# Altium PCB bridge8.PcbDoc
Units mil, origin at the board's own origin, x right, y up, seen from the top; angles counter-clockwise.
Board outline 1968.5 x 1102.36 mil, 4 copper layers (Top Layer, Signal Layer 1, Signal Layer 2, Bottom Layer), stack 30.635 mil thick; 4 components, 64 nets, 39 pads, 802 vias.
Unrouted connection lines stored in the file: 2.
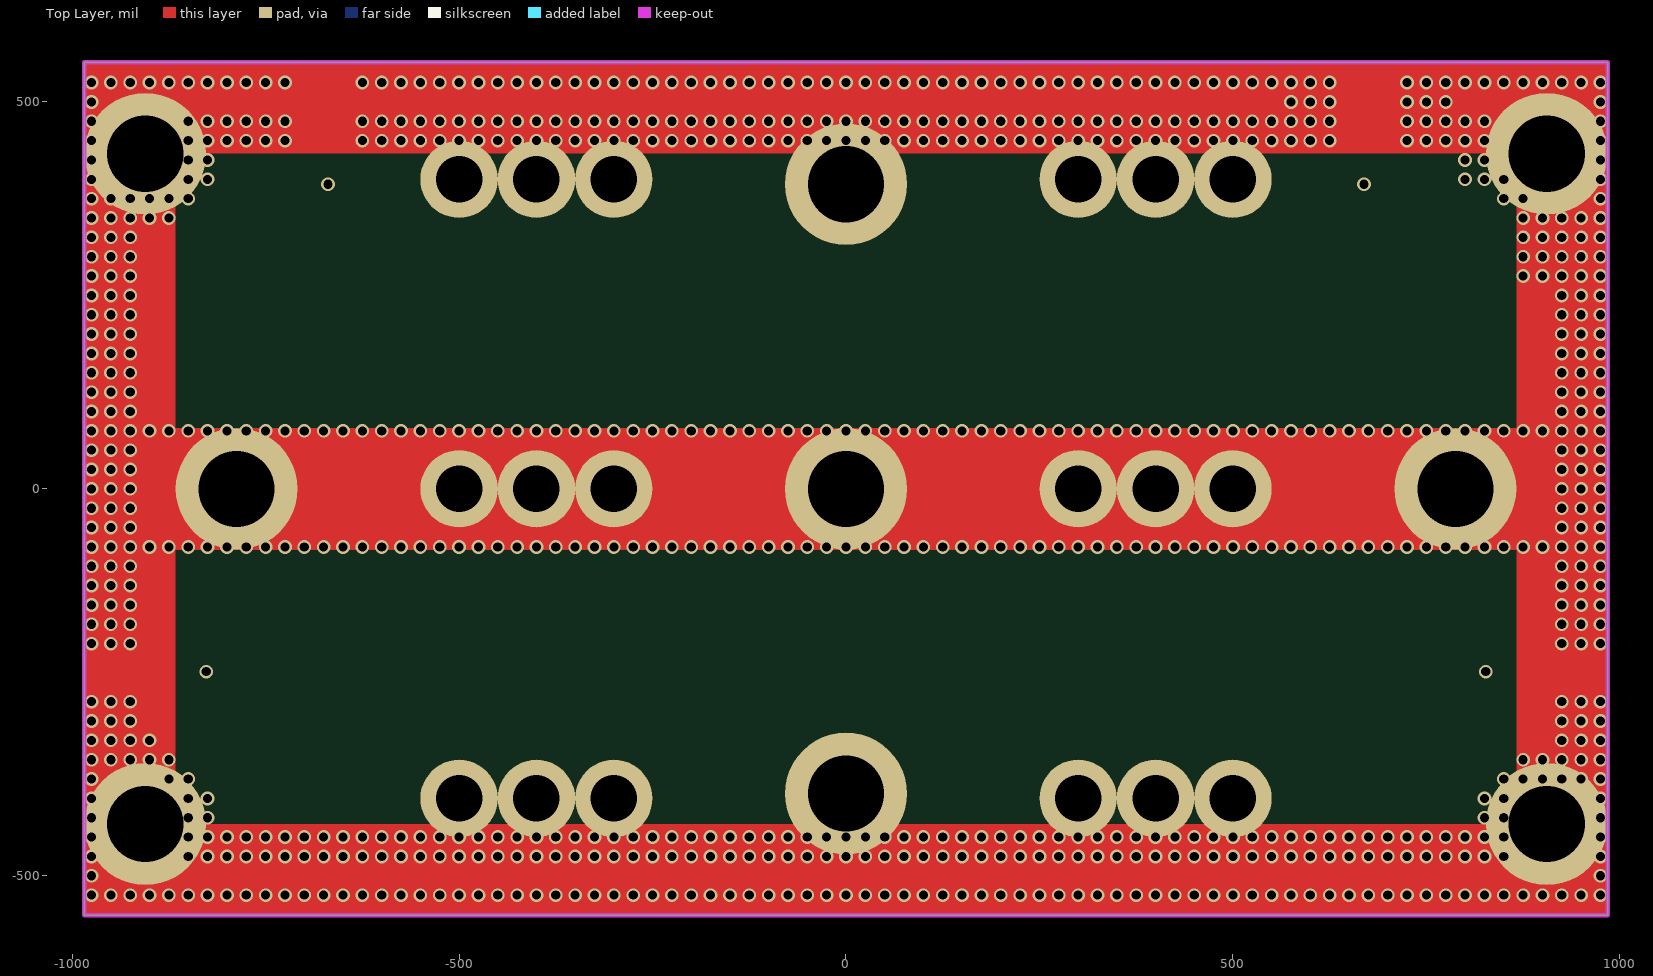
[diagram p0: Top Layer view]
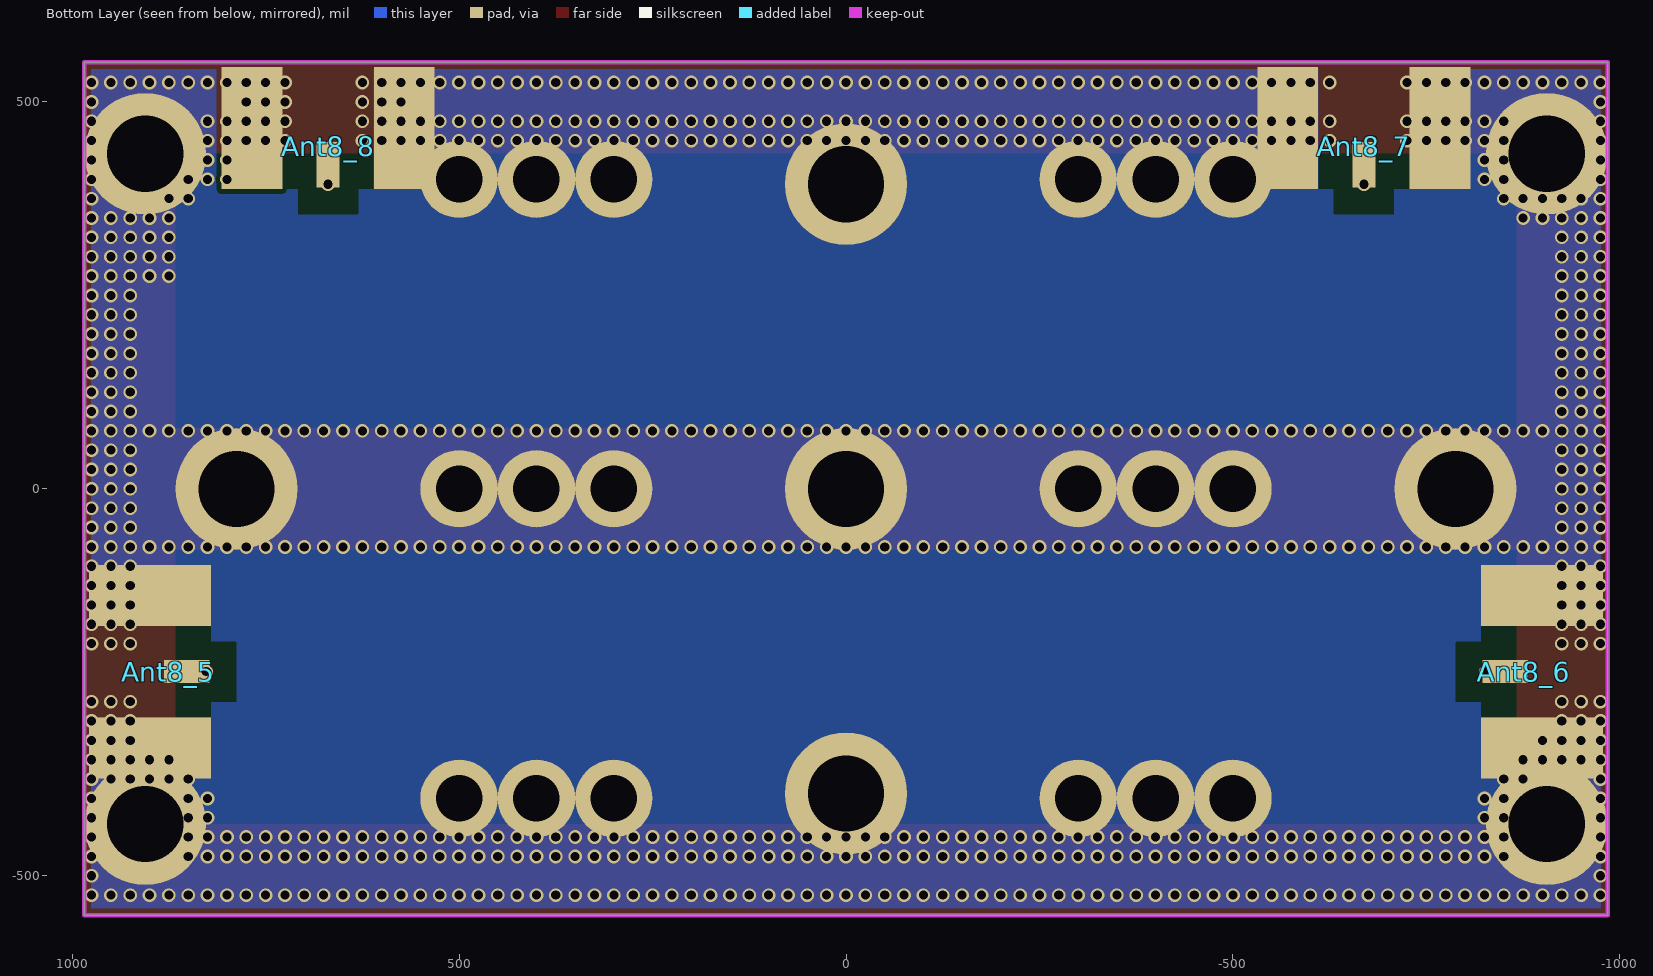
[diagram p1: Bottom Layer view, seen from below]
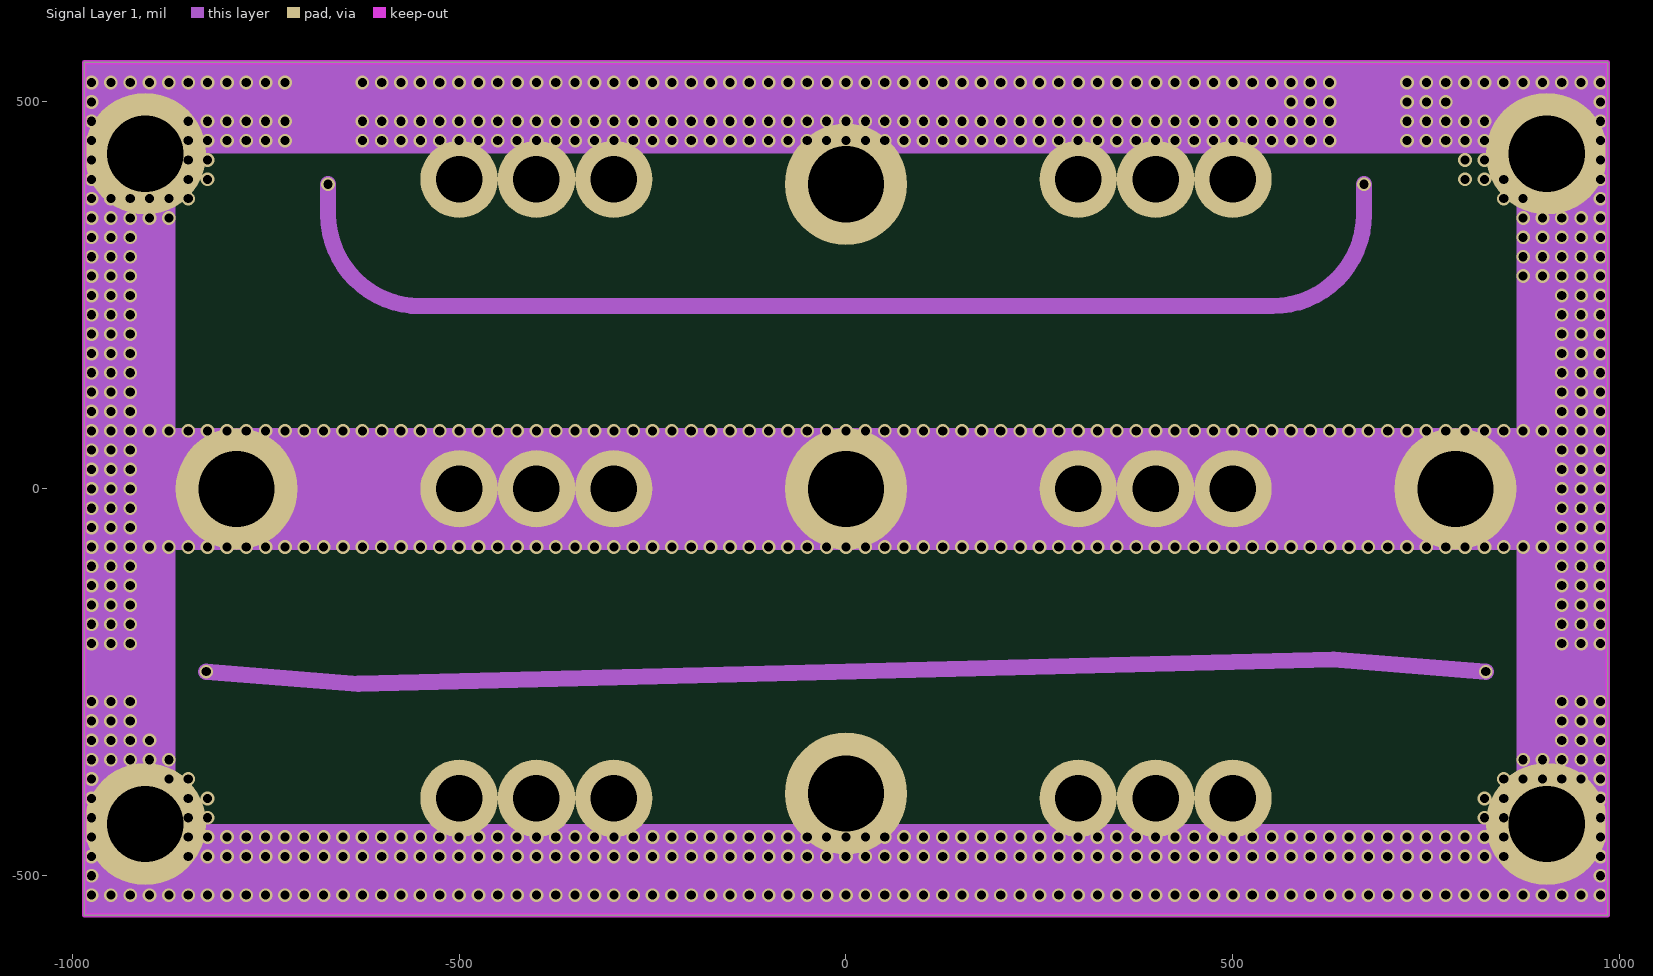
[diagram p2: Signal Layer 1]
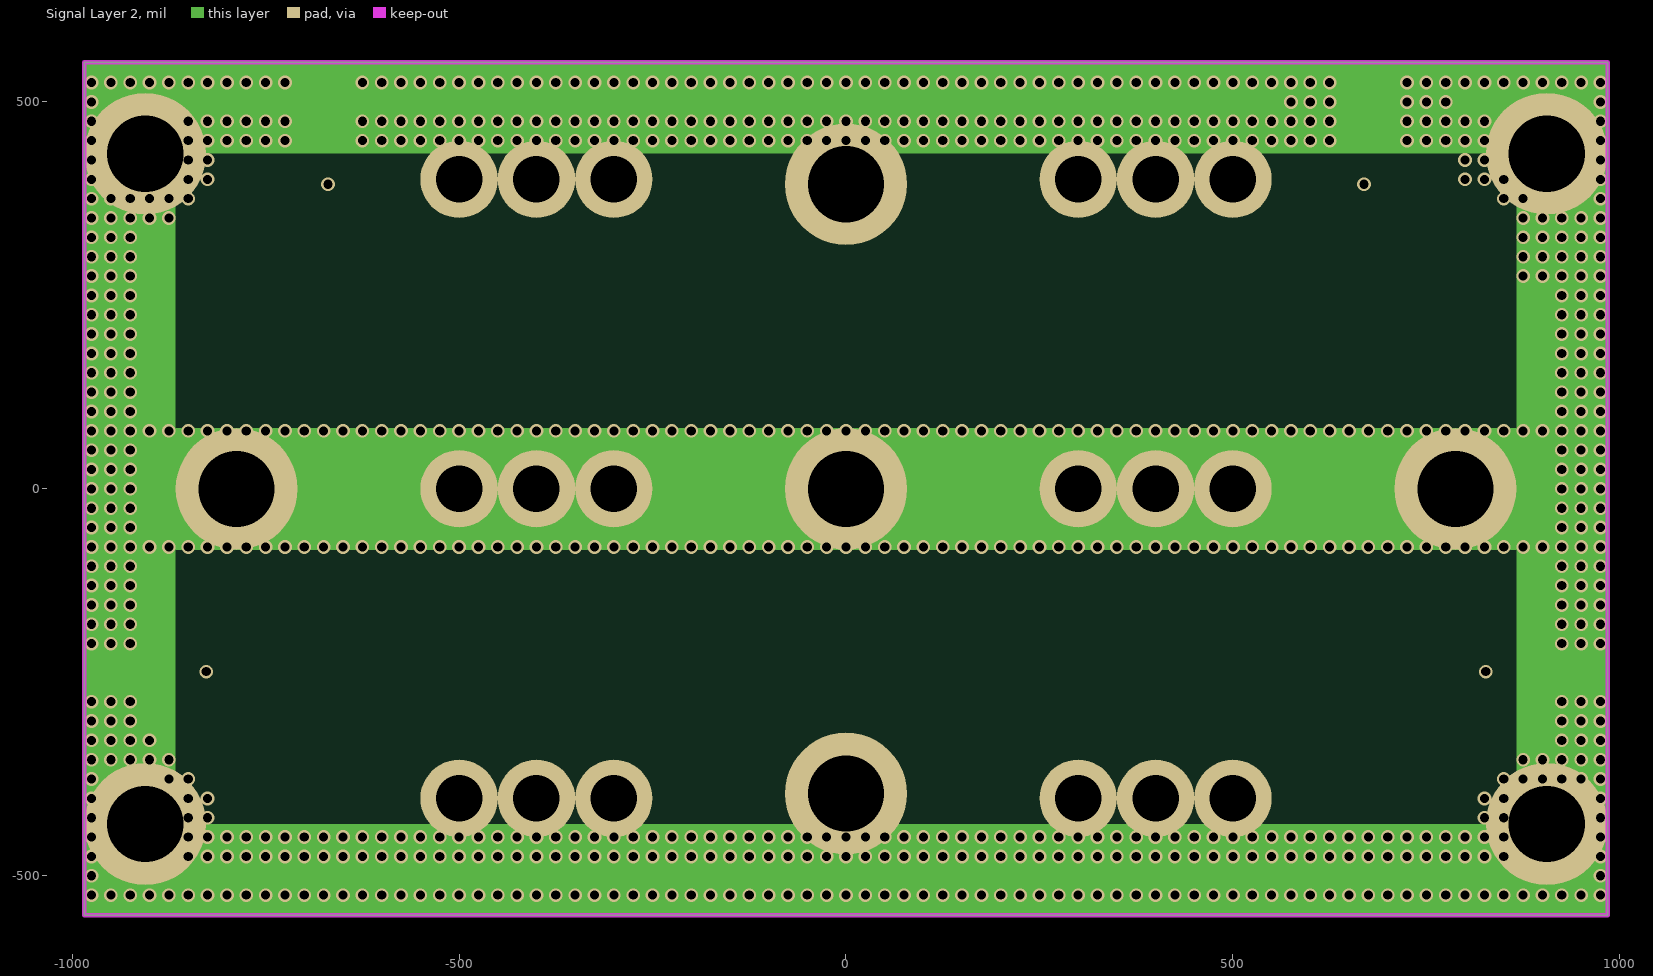
[diagram p3: Signal Layer 2]

## Layer stack, top to bottom
Top Solder: solder mask 0.4, Solder Resist, Dk 3.8
Top Layer: signal copper 1.4
Dielectric 1: core 10, Dk 4.2
Signal Layer 1: signal copper 1.4173
Dielectric 3: prepreg 5, Dk 4.2
Signal Layer 2: signal copper 1.4173
Dielectric 2: core 10, Dk 4.2
Bottom Layer: signal copper 1.4
Bottom Solder: solder mask 0.4, Solder Resist, Dk 3.8

## Board outline
-984.25,-551.18 -984.25,551.18 984.25,551.18 984.25,-551.18

## Design rules (kind name [scope] priority, off if disabled: settings)
Clearance [All] p1: gap=6 ignorepadtopadclearanceinfootprint=FALSE except(0: Arc-Hole Track-Hole SMDPad-Hole THPad-Hole Via-Hole Fill-Hole Poly-Hole Region-Hole Text-Hole)
DiffPairsRouting [All] p1: maxlimit=10 minlimit=10 mostfreqgap=10 toplayer_minwidth=5.98 toplayer_maxwidth=15 toplayer_prefwidth=15 midlayer1_minwidth=5.98 midlayer1_maxwidth=15 midlayer1_prefwidth=15 midlayer2_minwidth=15 midlayer2_maxwidth=15 midlayer2_prefwidth=15 bottomlayer_minwidth=5.98 bottomlayer_maxwidth=15 bottomlayer_prefwidth=15 maxuncoupledlength=500
MinimumSolderMaskSliver [All] p1 off: minsoldermaskwidth=10
PlaneClearance [All] p1: clearance=10
PlaneConnect [All] p1: planeconnectstyle=Direct reliefexpansion=20 reliefentries=4 reliefconductorwidth=10 reliefairgap=10
PolygonConnect [All] p1: connectstyle=Direct reliefconductorwidth=10 reliefentries=4 polygonreliefangle="90 Angle" airgapwidth=10
RoomDefinition mixer [InComponentClass('mixer')] p1 off: confinementstyle=ConfineIn formatcopy=TRUE lockcomponents=FALSE outline 1422.17,1139.62 6891.17,1139.62 6891.17,1534.62 1422.17,1534.62
RoomDefinition power [InComponentClass('power')] p2 off: confinementstyle=ConfineIn formatcopy=TRUE lockcomponents=FALSE outline 1418.17,-507.38 3763.17,-507.38 3763.17,-267.38 1418.17,-267.38
RoutingVias [All] p1: holewidth=12 width=20 viastyle="Through Hole" minholewidth=11.81 minwidth=19.68 maxholewidth=28 maxwidth=50
SilkToBoardRegionClearance [All] p1 off:
SilkToSilkClearance [All] p1 off: silktosilkclearance=10
SilkToSolderMaskClearance [IsPad] p1 off: minsilkscreentomaskgap=10 clearancetoexposedcopper=TRUE
SolderMaskExpansion [All] p1: expansion=4
Width [All] p1: maxlimit=60 minlimit=6 preferedwidth=6
23 further rules are at their usual default settings.

## Classes and differential pairs
component class mixer: R28
differential pair IF1: +IF1_P -IF1_N
differential pair IF2: +IF2_P -IF2_N

## Components (designator, comment, footprint, x,y, rotation, side; value= is the part's Value field where it differs from the comment)
Ant8_5 "Antenna" SMA-2 899.27,-137.8 r270 bottom (schematic designator Ant2)
Ant8_6 "Antenna" SMA-2 -899.25,-334.65 r90 bottom (schematic designator Ant2)
Ant8_7 "Antenna" SMA-2 -767.72,466.18 r0 bottom (schematic designator Ant2)
Ant8_8 "Antenna" SMA-2 570.87,466.18 r0 bottom (schematic designator Ant2)

## Footprints (in the part's own frame and the unit in brackets; to place one, negate y for a bottom-side part, rotate by r counter-clockwise, add the part's x,y. Pads: shape width x height; smd on the part's side, far side on the other; paste and mask are expansions set on the pad)
SMA-2 [mm]
  rect 0.75x1.5 smd: 1(2.5,1.2)
  rect 2x4 smd: GND(0,0) GND(5,0)
  Top Layer pour cut-out: 1,2 4,2 4,-2 1,-2

## Free pads (board coordinates)
  round 157.48 hole 98.43: 7(-905.51,-433.07) 9(0,-393.7) 11(905.51,-433.07) 12(-787.4,0) 14(0,0) 16(787.4,0) 17(-905.51,433.07) 19(0,393.7) 21(905.51,433.07)
  round 100 hole 60: 22(-300,-400) 23(-500,-400) 24(-400,-400) 25(-300,0) 26(-500,0) 27(-400,0) 28(-300,400) 29(-500,400) 30(-400,400) 31(300,400) 32(400,400) 33(500,400) 34(300,0) 35(400,0) 36(500,0) 37(300,-400) 38(400,-400) 39(500,-400)

## Via types
v1: diameter 17.72, hole 11.81, Top Layer to Bottom Layer, 802 vias

## Nets (pads, with @x,y where several pads share a name; then routed paths per layer and width w, separated by ;. In a path a pad name is that pad's centre, name@x,y a point inside that pad or via, vN(x,y) a via of type N, cw(c..) or ccw(c..) an arc to the next point about the centre after c; other vN are vias at no path point)
5V: 
5V-MIXER: 
5VA: Ant8_5.1 Ant8_6.1 | length 1654.8
  Signal Layer 1 w21: v1@-826.58,-236.22 -629.92,-251.97 629.92,-220.47 v1@826.58,-236.22
  other v1: -826.77,-236.22 826.77,-236.22
5VB: Ant8_7.1 Ant8_8.1 | length 1550.7
  Signal Layer 1 w21: -669.29,393.7 -669.29,354.33 ccw(c-550.59,354.92) -550,236.22 550,236.22 ; 551.18,236.22 ccw(c551.18,354.33) 669.29,354.33 669.29,393.7
6V: 
-3.3V: 
DETO: 
GND: Ant8_5.GND Ant8_6.GND Ant8_7.GND Ant8_8.GND@570.87,466.18 pad.7 pad.9 pad.11 pad.12 pad.14 pad.16 pad.17 pad.19 pad.21 pad.22 pad.23 pad.24 pad.25 pad.26 pad.27 pad.28 pad.29 pad.30 pad.31 pad.32 pad.33 pad.34 pad.35 pad.36 pad.37 pad.38 pad.39
  other v1: -975,-525 -950,-525 -925,-525 -900,-525 -875,-525 -850,-525 -825,-525 -800,-525 -775,-525 -750,-525 -725,-525 -700,-525 -675,-525 -650,-525 -625,-525 -600,-525 -575,-525 -550,-525 -525,-525 -500,-525 -475,-525 -450,-525 -425,-525 -400,-525 -375,-525 -350,-525 -325,-525 -300,-525 -275,-525 -250,-525 -225,-525 -200,-525 -175,-525 -150,-525 -125,-525 -100,-525 -75,-525 -50,-525 -25,-525 0,-525 25,-525 50,-525 75,-525 100,-525 125,-525 150,-525 175,-525 200,-525 225,-525 250,-525 275,-525 300,-525 325,-525 350,-525 375,-525 400,-525 425,-525 450,-525 475,-525 500,-525 525,-525 550,-525 575,-525 600,-525 625,-525 650,-525 675,-525 700,-525 725,-525 750,-525 775,-525 800,-525 825,-525 850,-525 875,-525 900,-525 925,-525 950,-525 975,-525 -975,-500 975,-500 -975,-475 -850,-475 -825,-475 -800,-475 -775,-475 -750,-475 -725,-475 -700,-475 -675,-475 -650,-475 -625,-475 -600,-475 -575,-475 -550,-475 -525,-475 -500,-475 -475,-475 -450,-475 -425,-475 -400,-475 -375,-475 -350,-475 -325,-475 -300,-475 -275,-475 -250,-475 -225,-475 -200,-475 -175,-475 -150,-475 -125,-475 -100,-475 -75,-475 -50,-475 -25,-475 0,-475 25,-475 50,-475 75,-475 100,-475 125,-475 150,-475 175,-475 200,-475 225,-475 250,-475 275,-475 300,-475 325,-475 350,-475 375,-475 400,-475 425,-475 450,-475 475,-475 500,-475 525,-475 550,-475 575,-475 600,-475 625,-475 650,-475 675,-475 700,-475 725,-475 750,-475 775,-475 800,-475 825,-475 850,-475 975,-475 -975,-450 -850,-450 -825,-450 -800,-450 -775,-450 -750,-450 -725,-450 -700,-450 -675,-450 -650,-450 -625,-450 -600,-450 -575,-450 -550,-450 -525,-450 -500,-450 -475,-450 -450,-450 -425,-450 -400,-450 -375,-450 -350,-450 -325,-450 -300,-450 -275,-450 -250,-450 -225,-450 -200,-450 -175,-450 -150,-450 -125,-450 -100,-450 -75,-450 -50,-450 -25,-450 0,-450 25,-450 50,-450 75,-450 100,-450 125,-450 150,-450 175,-450 200,-450 225,-450 250,-450 275,-450 300,-450 325,-450 350,-450 375,-450 400,-450 425,-450 450,-450 475,-450 500,-450 525,-450 550,-450 575,-450 600,-450 625,-450 650,-450 675,-450 700,-450 725,-450 750,-450 775,-450 800,-450 825,-450 850,-450 975,-450 -975,-425 -850,-425 -825,-425 825,-425 850,-425 975,-425 -975,-400 -850,-400 -825,-400 825,-400 850,-400 975,-400 -975,-375 -875,-375 -850,-375 850,-375 875,-375 900,-375 925,-375 950,-375 975,-375 -975,-350 -950,-350 -925,-350 -900,-350 -875,-350 875,-350 900,-350 925,-350 950,-350 975,-350 -975,-325 -950,-325 -925,-325 -900,-325 925,-325 950,-325 975,-325 -975,-300 -950,-300 -925,-300 925,-300 950,-300 975,-300 -975,-275 -950,-275 -925,-275 925,-275 950,-275 975,-275 -975,-200 -950,-200 -925,-200 925,-200 950,-200 975,-200 -975,-175 -950,-175 -925,-175 925,-175 950,-175 975,-175 -975,-150 -950,-150 -925,-150 925,-150 950,-150 975,-150 -975,-125 -950,-125 -925,-125 925,-125 950,-125 975,-125 -975,-100 -950,-100 -925,-100 925,-100 950,-100 975,-100 -975,-75 -950,-75 -925,-75 -900,-75 -875,-75 -850,-75 -825,-75 -800,-75 -775,-75 -750,-75 -725,-75 -700,-75 -675,-75 -650,-75 -625,-75 -600,-75 -575,-75 -550,-75 -525,-75 -500,-75 -475,-75 -450,-75 -425,-75 -400,-75 -375,-75 -350,-75 -325,-75 -300,-75 -275,-75 -250,-75 -225,-75 -200,-75 -175,-75 -150,-75 -125,-75 -100,-75 -75,-75 -50,-75 -25,-75 0,-75 25,-75 50,-75 75,-75 100,-75 125,-75 150,-75 175,-75 200,-75 225,-75 250,-75 275,-75 300,-75 325,-75 350,-75 375,-75 400,-75 425,-75 450,-75 475,-75 500,-75 525,-75 550,-75 575,-75 600,-75 625,-75 650,-75 675,-75 700,-75 725,-75 750,-75 775,-75 800,-75 825,-75 850,-75 875,-75 900,-75 925,-75 950,-75 975,-75 -975,-50 -950,-50 -925,-50 925,-50 950,-50 975,-50 -975,-25 -950,-25 -925,-25 925,-25 950,-25 975,-25 -975,0 -950,0 -925,0 925,0 950,0 975,0 -975,25 -950,25 -925,25 925,25 950,25 975,25 -975,50 -950,50 -925,50 925,50 950,50 975,50 -975,75 -950,75 -925,75 -900,75 -875,75 -850,75 -825,75 -800,75 -775,75 -750,75 -725,75 -700,75 -675,75 -650,75 -625,75 -600,75 -575,75 -550,75 -525,75 -500,75 -475,75 -450,75 -425,75 -400,75 -375,75 -350,75 -325,75 -300,75 -275,75 -250,75 -225,75 -200,75 -175,75 -150,75 -125,75 -100,75 -75,75 -50,75 -25,75 0,75 25,75 50,75 75,75 100,75 125,75 150,75 175,75 200,75 225,75 250,75 275,75 300,75 325,75 350,75 375,75 400,75 425,75 450,75 475,75 500,75 525,75 550,75 575,75 600,75 625,75 650,75 675,75 700,75 725,75 750,75 775,75 800,75 825,75 850,75 875,75 900,75 925,75 950,75 975,75 -975,100 -950,100 -925,100 925,100 950,100 975,100 -975,125 -950,125 -925,125 925,125 950,125 975,125 -975,150 -950,150 -925,150 925,150 950,150 975,150 -975,175 -950,175 -925,175 925,175 950,175 975,175 -975,200 -950,200 -925,200 925,200 950,200 975,200 -975,225 -950,225 -925,225 925,225 950,225 975,225 -975,250 -950,250 -925,250 925,250 950,250 975,250 -975,275 -950,275 -925,275 875,275 900,275 925,275 950,275 975,275 -975,300 -950,300 -925,300 875,300 900,300 925,300 950,300 975,300 -975,325 -950,325 -925,325 875,325 900,325 925,325 950,325 975,325 -975,350 -950,350 -925,350 -900,350 -875,350 875,350 900,350 925,350 950,350 975,350 -975,375 -950,375 -925,375 -900,375 -875,375 -850,375 850,375 875,375 975,375 -975,400 -850,400 -825,400 825,400 850,400 975,400 -975,425 -850,425 -825,425 800,425 825,425 975,425 -975,450 -850,450 -825,450 -800,450 -775,450 -750,450 -725,450 -625,450 -600,450 -575,450 -550,450 -525,450 -500,450 -475,450 -450,450 -425,450 -400,450 -375,450 -350,450 -325,450 -300,450 -275,450 -250,450 -225,450 -200,450 -175,450 -150,450 -125,450 -100,450 -75,450 -50,450 -25,450 0,450 25,450 50,450 75,450 100,450 125,450 150,450 175,450 200,450 225,450 250,450 275,450 300,450 325,450 350,450 375,450 400,450 425,450 450,450 475,450 500,450 525,450 550,450 575,450 600,450 625,450 725,450 750,450 775,450 800,450 825,450 975,450 -975,475 -850,475 -825,475 -800,475 -775,475 -750,475 -725,475 -625,475 -600,475 -575,475 -550,475 -525,475 -500,475 -475,475 -450,475 -425,475 -400,475 -375,475 -350,475 -325,475 -300,475 -275,475 -250,475 -225,475 -200,475 -175,475 -150,475 -125,475 -100,475 -75,475 -50,475 -25,475 0,475 25,475 50,475 75,475 100,475 125,475 150,475 175,475 200,475 225,475 250,475 275,475 300,475 325,475 350,475 375,475 400,475 425,475 450,475 475,475 500,475 525,475 550,475 575,475 600,475 625,475 725,475 750,475 775,475 800,475 825,475 975,475 -975,500 575,500 600,500 625,500 725,500 750,500 775,500 975,500 -975,525 -950,525 -925,525 -900,525 -875,525 -850,525 -825,525 -800,525 -775,525 -750,525 -725,525 -625,525 -600,525 -575,525 -550,525 -525,525 -500,525 -475,525 -450,525 -425,525 -400,525 -375,525 -350,525 -325,525 -300,525 -275,525 -250,525 -225,525 -200,525 -175,525 -150,525 -125,525 -100,525 -75,525 -50,525 -25,525 0,525 25,525 50,525 75,525 100,525 125,525 150,525 175,525 200,525 225,525 250,525 275,525 300,525 325,525 350,525 375,525 400,525 425,525 450,525 475,525 500,525 525,525 550,525 575,525 600,525 625,525 725,525 750,525 775,525 800,525 825,525 850,525 875,525 900,525 925,525 950,525 975,525
IF1_N: 
IF1_P: 
IF2_N: 
IF2_P: 
IF3+: 
IF3-: 
NetAnt1_1: 
NetAnt2_1: 
NetC1_1: 
NetC1_2: 
NetC2_1: 
NetC4_1: 
NetC7_2: 
NetC11_2: 
NetC15_2: 
NetC18_2: 
NetC24_2: 
NetC28_1: 
NetC28_2: 
NetC29_1: 
NetC30_1: 
NetC30_2: 
NetC31_1: 
NetC31_2: 
NetC43_2: 
NetC44_1: 
NetC44_2: 
NetC45_2: 
NetC46_1: 
NetC46_2: 
NetC47_2: 
NetC48_2: 
NetC49_1: 
NetC49_2: 
NetC50_1: 
NetC50_2: 
NetC51_2: 
NetC53_2: 
NetC57_1: 
NetC57_2: 
NetC58_1: 
NetC58_2: 
NetC59_1: 
NetC59_2: 
NetC60_1: 
NetC60_2: 
NetC64_2: 
NetC66_2: 
NetR2_1: 
NetR4_1: 
NetR5_1: 
NetR10_1: 
NetR15_1: 
NetR24_1: 
VSET: 
VSYS: 
pads on no net: Ant8_8.GND@767.72,466.18
copper on no net:
  other v1: -669.29,393.7 669.29,393.7 800,400

## Polygon pours and split planes (outlines as drawn)
GND on Bottom Layer "GND_L04_P000" (solid, remove dead copper, pour order 0): -984.25,-551.18 -984.25,551.18 984.25,551.18 984.25,-551.18

## Keep-outs
Keep-Out Layer:
  the board outline again, w6

## Other copper
Top Layer:
  rectangle net GND: -984.25,-78.74 984.25,78.74
  rectangle net GND: -984.25,-452.76 -866.14,433.07
  rectangle net GND: -984.25,433.07 866.14,551.18
  rectangle net GND: 866.14,-452.76 984.25,551.18
  rectangle net GND: -984.25,-551.18 984.25,-433.07
Signal Layer 1:
  rectangle net GND: -984.25,-78.74 984.25,78.74
  rectangle net GND: -984.25,-551.18 984.25,-433.07
  rectangle net GND: 866.14,-452.76 984.25,551.18
  rectangle net GND: -984.25,433.07 866.14,551.18
  rectangle net GND: -984.25,-452.76 -866.14,433.07
Signal Layer 2:
  rectangle net GND: -984.25,-78.74 984.25,78.74
  rectangle net GND: -984.25,-551.18 984.25,-433.07
  rectangle net GND: 866.14,-452.76 984.25,551.18
  rectangle net GND: -984.25,433.07 866.14,551.18
  rectangle net GND: -984.25,-452.76 -866.14,433.07
Bottom Layer:
  pour cut-out: 840.21,-275.59 787.4,-275.59 787.4,-196.85 840.21,-196.85
  pour cut-out: 708.66,413.39 708.66,354.33 629.92,354.33 629.92,413.39
  pour cut-out: -629.92,413.39 -629.92,354.33 -708.66,354.33 -708.66,413.39
  pour cut-out: -846.46,-196.85 -787.4,-196.85 -787.4,-275.59 -846.46,-275.59

## Silkscreen, mask and mechanical layers (free items; w line width, h text height)
Top Solder:
  rectangle: -905.51,-452.76 905.51,433.07